# Altium PCB Sistema.PcbDoc (part 2 of 2)
Units mm, origin at the board's own origin, x right, y up, seen from the top; angles counter-clockwise.
Board outline 81.66 x 60.96 mm, 2 copper layers (Top Layer, Bottom Layer); 81 components, 62 nets, 413 pads, 84 vias.
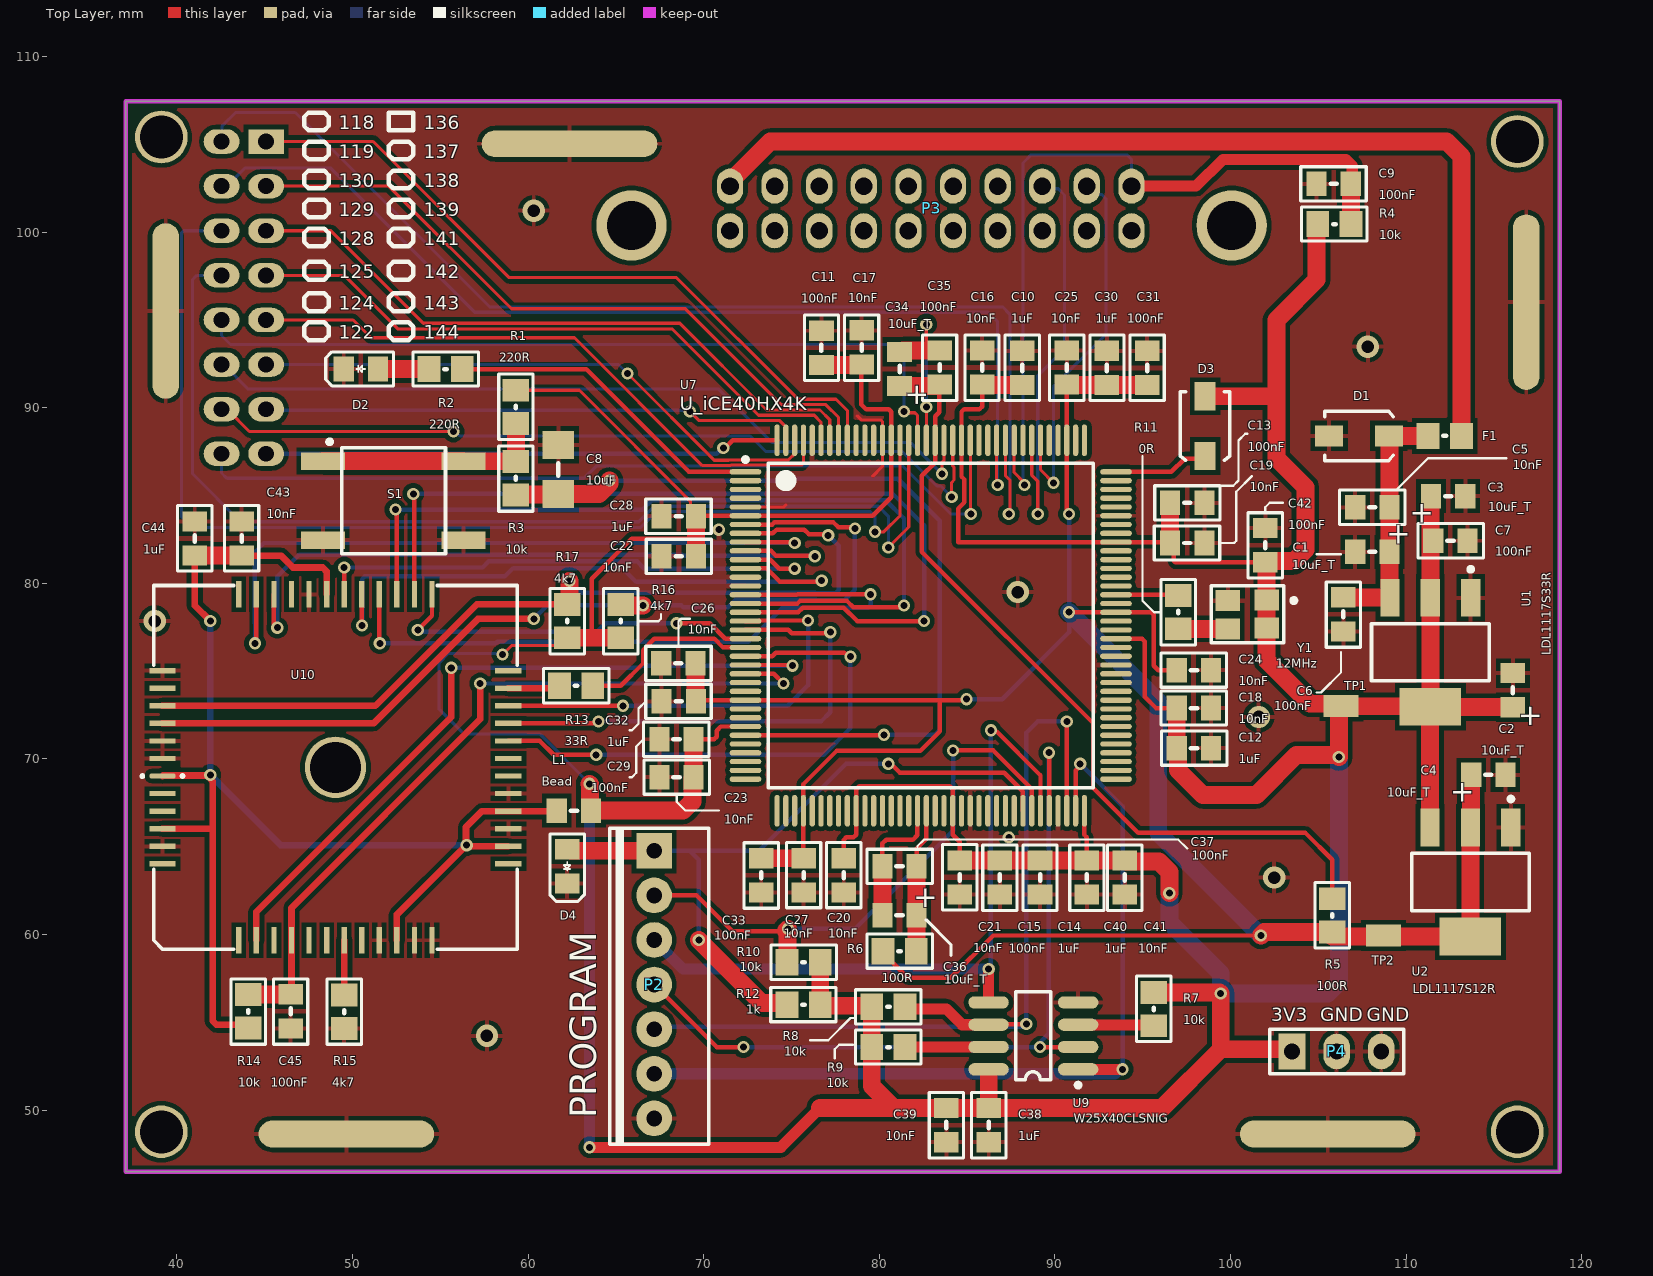
[diagram p0: Top Layer view]

## Via types
v1: diameter 0.7, hole 0.4, Top Layer to Bottom Layer, tented both sides, 77 vias
v2: diameter 1.27, hole 0.711, Top Layer to Bottom Layer, tented both sides, 7 vias

## Nets (pads, with @x,y where several pads share a name; then routed paths per layer and width w, separated by ;. In a path a pad name is that pad's centre, name@x,y a point inside that pad or via, vN(x,y) a via of type N, cw(c..) or ccw(c..) an arc to the next point about the centre after c; other vN are vias at no path point) (continued)
NetF1_1: F1.1 P3.A1 | length 59.1
  Top Layer w1.016: P3.A1 71.501,102.866 73.791,105.156 112.308,105.156 113.152,104.312 F1.1
NetP1_1: P1.1 U7.136 | length 41.1
  Top Layer w0.178: P1.1 51.181,105.156 58.928,97.409 68.453,97.409 75.38,90.482 77.539,90.482 78.181,89.84 U7.136
NetP1_2: P1.2 U7.118 | length 66.6
  Top Layer w0.178: U7.118 87.181,86.138 87.434,85.885 87.434,84.005 v1(87.376,83.947)
  Bottom Layer w0.178: P1.2 42.562,105.173 42.562,106.017 43.352,106.807 46.736,106.807 57.803,95.74 87.013,95.74 87.434,95.319 87.434,84.005 v1(87.376,83.947)
NetP1_3: P1.3 U7.137 | length 39.4
  Top Layer w0.178: P1.3 52.07,102.616 59.055,95.631 68.961,95.631 74.415,90.177 76.955,90.177 77.681,89.451 U7.137
NetP1_4: P1.4 U7.119 | length 60.1
  Top Layer w0.178: U7.119 86.681,85.658 v1(86.741,85.598)
  Bottom Layer w0.178: P1.4 42.862,102.616 43.904,103.657 48.743,103.657 56.965,95.435 86.198,95.435 86.741,94.892 v1(86.741,85.598)
NetP1_5: P1.5 U7.138 | length 37.7
  Top Layer w0.178: P1.5 48.768,100.076 54.038,94.805 68.644,94.805 73.576,89.873 76.624,89.873 77.181,89.316 U7.138
NetP1_6: P1.6 U7.130 | length 65.7
  Top Layer w0.178: v1(79.756,82.931) 80.264,82.931 81.181,83.848 U7.130
  Bottom Layer w0.178: P1.6 40.386,100.076 40.259,99.949 40.259,83.82 40.894,83.185 66.412,83.185 67.308,84.081 79.502,84.081 79.756,83.827 v1(79.756,82.931)
NetP1_7: P1.7 U7.139 | length 36.1
  Top Layer w0.178: P1.7 49.53,97.536 52.578,94.488 68.199,94.488 73.119,89.568 76.294,89.568 76.681,89.181 U7.139
NetP1_8: P1.8 U7.129 | length 62.5
  Top Layer w0.178: v1(80.518,82.042) 81.681,83.205 U7.129
  Bottom Layer w0.178: P1.8 41.143,97.536 40.891,97.285 40.894,97.282 40.894,86.233 43.619,83.508 66.304,83.508 67.182,84.386 79.952,84.386 80.518,83.82 v1(80.518,82.042)
NetP1_9: P1.9 U7.141 | length 35.4
  Top Layer w0.178: P1.9 50.038,94.996 51.054,93.98 62.647,93.98 69.926,86.701 71.533,86.701 71.558,86.726 75.562,86.726 75.681,86.845 U7.141
NetP1_10: P1.10 U7.128 | length 45.5
  Top Layer w0.178: v1(81.412,89.789) 81.489,89.712 82.028,89.712 82.175,89.565 82.175,88.153 U7.128
  Bottom Layer w0.178: P1.10 42.545,94.114 43.06,93.599 80.518,93.599 81.412,92.705 v1(81.412,89.789)
NetP1_11: P1.11 U7.142 | length 33.3
  Top Layer w0.178: v1(65.659,91.948) 70.601,87.006 71.407,87.006 71.432,87.031 74.833,87.031 75.181,87.38 U7.142
  Bottom Layer w0.178: P1.11 65.151,92.456 v1(65.659,91.948)
NetP1_12: P1.12 U7.125 | length 45.6
  Top Layer w0.178: v1(83.566,86.233) 83.566,86.862 83.681,86.977 U7.125
  Bottom Layer w0.178: P1.12 42.672,92.456 44.069,91.059 70.866,91.059 73.914,88.011 81.788,88.011 v1(83.566,86.233)
NetP1_13: P1.13 U7.143 | length 30.8
  Top Layer w0.178: v1(69.215,89.789) 69.741,89.263 74.333,89.263 74.681,88.914 U7.143
  Bottom Layer w0.178: P1.13 45.148,89.852 69.151,89.852 v1(69.215,89.789)
NetP1_14: P1.14 U7.124 | length 47
  Top Layer w0.178: P1.14 42.862,89.916 44.133,88.646 v1(55.753,88.646) ; v1(84.12,84.917) 84.12,85.741 84.259,85.881 84.259,86.616 84.181,86.694 U7.124
  Bottom Layer w0.178: v1(55.753,88.646) 55.864,88.646 56.118,88.392 72.644,88.392 73.533,87.503 81.316,87.503 83.279,85.54 83.497,85.54 v1(84.12,84.917)
NetP1_15: P1.15 U7.144 | length 29.4
  Top Layer w0.254: v1(71.12,87.699) 71.216,87.699 71.655,88.138 74.16,88.138 74.169,88.147 U7.144
  Bottom Layer w0.254: P1.15 70.748,87.376 71.071,87.699 v1(71.12,87.699)
NetP1_16: P1.16 U7.122 | length 49.5
  Top Layer w0.178: U7.122 85.199,88.129 85.199,83.965 v1(85.217,83.947)
  Bottom Layer w0.178: P1.16 42.545,86.283 42.849,85.979 63.181,85.979 63.874,86.672 81.349,86.672 84.074,83.947 v1(85.217,83.947)
NetP2_2: P2.2 R10.1 U7.66 | length 33.4
  Top Layer w0.254: P2.2 69.596,62.23 71.628,60.198 v1@74.676,60.198 ; v1(84.201,70.485) 86.487,70.485 88.681,68.291 U7.66
  Top Layer w1.016: v1@74.676,60.198 v1(74.803,60.325) 74.773,60.295 74.773,58.451 R10.1
  Bottom Layer w0.254: v1(74.803,60.325) 78.613,60.325 84.201,65.913 v1(84.201,70.485)
NetP2_3: P2.3 U7.67 U9.5 | length 41.2
  Top Layer w0.254: v1(86.36,71.628) 86.445,71.543 86.699,71.543 89.181,69.061 U7.67
  Top Layer w0.635: U9.5 86.223,58.029 v1(86.233,58.039)
  Bottom Layer w0.254: v1(86.233,58.039) 86.36,58.166 v1(86.36,71.628)
  Bottom Layer w0.635: P2.3 68.834,58.039 v1(86.233,58.039)
NetP2_4: P2.4 U7.68 U9.2 | length 45.9
  Top Layer w0.254: P2.4 70.739,53.594 v1(72.263,53.594) ; v1(89.154,53.594) U9.2 ; v1(89.662,70.358) 89.672,70.348 89.672,67.056 U7.68
  Bottom Layer w0.254: v1(72.263,53.594) v1(89.154,53.594) 89.154,53.869 89.662,54.377 v1(89.662,70.358)
NetP2_5: P2.5 R9.1 U7.70 U9.6 | length 52.9
  Top Layer w0.254: U9.6 86.241,54.882 88.351,54.882 v1(88.37,54.901) ; v1(90.678,72.136) 90.678,68.855 90.679,68.853 90.679,67.049 U7.70
  Top Layer w0.635: R9.1 81.595,55.753 83.82,55.753 84.709,54.864 U9.6
  Bottom Layer w0.254: P2.5 67.328,54.755 88.224,54.755 v1(88.37,54.901) 88.37,71.479 89.027,72.136 v1(90.678,72.136)
NetP2_6: P2.6 U7.71 U9.1 | length 50.5
  Top Layer w0.254: U7.71 91.181,69.343 91.44,69.602 v1(91.44,69.723)
  Top Layer w0.635: U9.1 v1(93.853,52.324)
  Bottom Layer w0.254: v1(91.44,69.723) 93.853,67.31 v1(93.853,52.324)
  Bottom Layer w0.635: P2.6 93.427,52.07 93.681,52.324 v1(93.853,52.324)
NetP3_A8: P3.A8 U7.115 | length 24.6
  Top Layer w0.178: U7.115 88.681,86.162 89.027,85.816 v1(89.027,83.947)
  Bottom Layer w0.178: v1(89.027,83.947) 89.027,91.828 90.551,93.352 90.551,102.108 90.194,102.465 89.432,102.465 P3.A8
NetP3_A9: P3.A9 U7.114 | length 21.5
  Top Layer w0.178: U7.114 89.181,86.46 v1(89.916,85.725)
  Bottom Layer w0.178: v1(89.916,85.725) 89.916,91.186 92.914,94.184 92.914,101.904 92.678,102.14 92.297,102.14 P3.A9
NetR1_1: R1.1 R3.1 S1.1 | length 13.2
  Top Layer w1.016: S1.1@48.324,86.959 56.324,86.959 56.332,86.951 59.287,86.951 R3.1 R1.1
NetR7_1: R7.1 U9.3 | length 4.3
  Top Layer w0.635: U9.3 91.335,54.852 95.582,54.852 R7.1
NetR8_1: R8.1 U9.7 | length 4.8
  Top Layer w0.635: R8.1 U9.7
NetR11_1: R11.1 U7.94 | length 3.6
  Top Layer w0.254: U7.94 96.99,79.347 R11.1
NetR11_2: R11.2 Y1.3 | length 2.8
  Top Layer w1.016: R11.2 97.029,77.408 Y1.3 Y1.3
NetR13_1: R13.1 U10.29 | length 3
  Top Layer w0.254: R13.1@61.645,74.025 R13.1
  Top Layer w0.381: U10.29 R13.1@61.645,74.025
NetR13_2: R13.2 U7.21 | length 10.4
  Top Layer w0.254: R13.2 65.278,74.168 66.548,75.438 66.548,76.2 67.183,76.835 70.612,76.835 71.1,76.347 U7.21
NetR15_2: R15.2 U10.13 | length 3.2
  Top Layer w0.381: R15.2@49.53,56.449 U10.13
NetR16_1: R16.1 U7.7 U10.46 | length 53.9
  Top Layer w0.254: U7.7 73.9,83.347 74.019,83.466 77.392,83.466 77.656,83.201 78.528,83.201 v1(78.613,83.116)
  Top Layer w0.381: U10.46 51.197,72.025 57.15,77.978 v1(60.325,77.978)
  Top Layer w1.016: R16.1 65.339,78.74 v1(66.548,78.74)
  Bottom Layer w0.254: v1(60.325,77.978) 61.087,78.74 68.718,78.74 68.83,78.628 71.386,78.628 71.816,79.057 76.407,79.057 76.423,79.041 78.025,79.041 78.613,79.629 v1(78.613,83.116)
NetR17_1: R17.1 U7.8 U10.45 | length 50.8
  Top Layer w0.254: U7.8@72.39,82.838 72.399,82.847 73.939,82.847 74.15,83.058 75.729,83.058 75.983,82.804 77.02,82.804 v1(77.089,82.735)
  Top Layer w0.381: U10.45 51.305,73.025 57.081,78.801 R17.1
  Top Layer w1.016: R17.1 62.357,78.928 v1(62.357,80.137)
  Bottom Layer w0.254: v1(62.357,80.137) 63.023,79.471 76.367,79.471 76.399,79.438 76.564,79.438 76.581,79.422 77.494,79.422 77.692,79.62 77.692,82.132 v1(77.089,82.735)
NetU7_9: U7.9 U10.41 | length 41.8
  Top Layer w0.254: v1(44.45,76.581) 44.53,76.661 U10.41 ; U7.9 72.39,82.338 75.142,82.338 v1(75.184,82.296)
  Bottom Layer w0.254: v1(44.45,76.581) 44.472,76.603 44.472,77.702 44.45,77.724 44.45,81.788 44.958,82.296 v1(75.184,82.296)
NetU7_10: U7.10 U10.40 | length 40.1
  Top Layer w0.254: U10.40 45.53,77.66 v1(45.72,77.47) ; U7.10 73.837,81.847 74.119,81.565 76.296,81.565 v1(76.327,81.534)
  Bottom Layer w0.254: v1(45.72,77.47) 45.72,80.391 46.959,81.63 68.782,81.63 68.847,81.565 76.296,81.565 v1(76.327,81.534)
NetU7_11: U7.11 U10.36 | length 30.5
  Top Layer w0.254: U10.36 v1(49.53,80.899) ; U7.11 73.798,81.347 74.311,80.834 v1(75.184,80.834)
  Bottom Layer w0.254: v1(49.53,80.899) 57.415,80.899 57.765,81.249 66.207,81.249 66.622,80.834 v1(75.184,80.834)
NetU7_12: U7.12 U10.35 | length 35.9
  Top Layer w0.254: U10.35 50.538,79.367 50.538,77.605 v1(50.546,77.597) ; U7.12 73.585,80.847 74.342,80.09 76.655,80.09 v1(76.718,80.153)
  Bottom Layer w0.254: v1(50.546,77.597) 50.546,80.242 50.695,80.391 58.674,80.391 59.151,80.868 65.371,80.868 66.149,80.09 76.655,80.09 v1(76.718,80.153)
NetU7_15: U7.15 U10.34 | length 39.4
  Top Layer w0.254: U10.34 51.53,76.613 v1(51.562,76.581) ; U7.15 75.3,79.347 75.328,79.375 v1(79.502,79.375)
  Bottom Layer w0.254: v1(51.562,76.581) 58.148,76.581 58.244,76.677 72.55,76.677 74.486,78.613 79.353,78.613 79.502,78.762 v1(79.502,79.375)
NetU7_16: U7.16 U10.33 | length 48.7
  Top Layer w0.254: v1(52.451,84.201) 52.53,84.122 U10.33 ; U7.16 75.338,78.847 75.485,78.994 78.163,78.994 78.513,78.644 81.19,78.644 81.286,78.74 v1(81.407,78.74)
  Bottom Layer w0.254: v1(52.451,84.201) 66.512,84.201 67.04,84.729 80.371,84.729 81.407,83.693 v1(81.407,78.74)
NetU7_17: U7.17 U10.32 | length 51.6
  Top Layer w0.254: v1(53.467,85.09) 53.53,85.027 U10.32 ; U7.17 75.377,78.347 75.643,78.613 77.978,78.613 78.74,77.851 v1(82.55,77.851)
  Bottom Layer w0.254: v1(53.467,85.09) 66.863,85.09 66.882,85.11 80.752,85.11 82.55,83.312 v1(82.55,77.851)
NetU7_18: U7.18 U10.28 | length 24.8
  Top Layer w0.254: U10.28 v1(65.405,73.025) ; U7.18 73.143,77.847 73.178,77.882 v1(75.946,77.882)
  Bottom Layer w0.254: v1(65.405,73.025) 74.781,73.025 75.946,74.19 v1(75.946,77.882)
NetU7_19: U7.19 U10.27 | length 28.1
  Top Layer w0.254: U10.27 63.776,72.025 63.887,72.136 v1(64.008,72.136) ; U7.19 74.824,77.347 75.02,77.151 77.151,77.151 v1(77.216,77.216)
  Bottom Layer w0.254: v1(64.008,72.136) 76.686,72.136 77.216,72.666 v1(77.216,77.216)
NetU7_20: U7.20 U10.31 | length 21.6
  Top Layer w0.254: v1(53.721,77.343) 54.53,78.152 U10.31 ; v1(68.453,77.724) 70.358,77.724 71.235,76.847 U7.20
  Bottom Layer w0.254: v1(53.721,77.343) 53.817,77.247 63.939,77.247 64.416,77.724 v1(68.453,77.724)
NetU7_22: U7.22 U10.26 | length 30.7
  Top Layer w0.254: U10.26 60.674,71.025 61.468,70.231 v1(63.881,70.231) ; U7.22 73.905,75.847 74.1,76.042 78.015,76.042 78.238,75.819 v1(78.359,75.819)
  Bottom Layer w0.254: v1(63.881,70.231) 76.835,70.231 78.359,71.755 v1(78.359,75.819)
NetU7_23: U7.23 U10.8 | length 42.3
  Top Layer w0.254: U7.23 75.021,75.347 v1(75.057,75.311)
  Top Layer w0.381: U10.8 44.53,61.294 55.626,72.39 v1(55.626,75.184)
  Bottom Layer w0.254: v1(55.626,75.184) 66.327,75.184 66.454,75.311 v1(75.057,75.311)
VAA: C43.2 C44.2 L1.2 R14.2 U10.1 U10.4 U10.16 U10.20 U10.22 U10.37 | length 76.1
  Top Layer w0.381: U10.4 42.037,66.025 ; U10.1 39.211,69.056 41.878,69.056 v1(41.91,69.088) 41.971,69.027 41.971,68.801 42.037,68.735 42.037,66.025 ; C44.2 41.021,78.74 v1(41.91,77.851) ; C43.2 45.933,81.575 46.609,80.899 48.307,80.899 48.53,80.676 U10.37 ; R14.2 43.881,54.864 42.26,54.864 42.037,55.087 42.037,66.025 ; U10.16 52.53,61.136 v1@56.467,65.074 ; v1@56.467,65.089 56.467,66.119 57.373,67.025 U10.22 61.605,67.025 L1.2 ; v1@56.516,65.025 U10.20
  Top Layer w1.016: C44.2 C43.2
  Bottom Layer w0.381: v1(41.91,77.851) v1(41.91,69.088) 45.909,65.089 v1(56.503,65.089)
pads on no net: P3.A2 P3.A3 P3.A4 P3.A5 P3.A6 P3.A7 P3.B1 P3.B2 P3.B3 P3.B4 P3.B5 P3.B6 P3.B7 P3.B8 P3.B9 P3.B10 P3.SOP U7.2 U7.3 U7.4 U7.25 U7.26 U7.28 U7.29 U7.32 U7.33 U7.34 U7.35 U7.36 U7.37 U7.38 U7.39 U7.41 U7.42 U7.43 U7.44 U7.45 U7.47 U7.48 U7.49 U7.50 U7.51 U7.52 U7.55 U7.56 U7.58 U7.60 U7.61 U7.62 U7.63 U7.64 U7.73 U7.74 U7.75 U7.76 U7.77 U7.78 U7.79 U7.80 U7.81 U7.82 U7.83 U7.84 U7.85 U7.87 U7.88 U7.90 U7.91 U7.93 U7.95 U7.96 U7.97 U7.98 U7.99 U7.101 U7.102 U7.104 U7.105 U7.106 U7.107 U7.109 U7.110 U7.112 U7.113 U7.116 U7.120 U7.121 U7.133 U7.134 U7.135 U10.2 U10.3 U10.6 U10.7 U10.9 U10.11 U10.12 U10.14 U10.19 U10.24 U10.25 U10.30 U10.39 U10.42 U10.44

## Polygon pours and split planes (outlines as drawn)
GND on Top Layer "GND_L01_P001" (solid, pour order 1): 37.084,46.482 37.084,107.442 118.745,107.442 118.745,46.482
GND on Bottom Layer "GND_L02_P000" (solid, pour order 0): 37.084,46.482 37.084,107.442 118.745,107.442 118.745,46.482

## Keep-outs
Keep-Out Layer:
  the board outline again, w0.254

## Silkscreen, mask and mechanical layers (free items; w line width, h text height)
Top Overlay:
  drawing of 173 lines, arcs and shapes, not listed
  text "118" at 49.225,105.867 h0.76
  text "136" at 54.051,105.867 h0.76
  text "119" at 49.225,104.216 h0.76
  text "137" at 54.051,104.216 h0.76
  text "130" at 49.225,102.565 h0.76
  text "138" at 54.051,102.565 h0.76
  text "129" at 49.225,100.914 h0.76
  text "139" at 54.051,100.914 h0.76
  text "128" at 49.225,99.263 h0.76
  text "141" at 54.051,99.263 h0.76
  text "125" at 49.225,97.358 h0.76
  text "142" at 54.051,97.358 h0.76
  text "124" at 49.225,95.58 h0.76
  text "143" at 54.051,95.58 h0.76
  text "122" at 49.225,93.929 h0.76
  text "144" at 54.051,93.929 h0.76
  text "3V3" at 102.311,55.067 h0.76
  text "GND" at 105.105,55.067 h0.76
  text "GND" at 107.772,55.067 h0.76
Bottom Overlay:
  drawing of 4 lines, arcs and shapes, not listed
  text "FACULTAD" at 65.92,79.979 h2.54
  text "DE" at 65.793,75.915 h2.54
  text "INGENIERIA" at 66.174,72.105 h2.54
  text "UNMDP" at 107.315,69.342 h2.54

## Dimensions
37.084,46.482 to 118.745,107.442 on Top Overlay
118.745,46.482 to 118.745,107.442 on Top Overlay

## Text inside footprints (layer, text, board x,y; h text height)
C1: Top Overlay "+" at 110.252,83.313 h1.2 r180
C2: Top Overlay "+" at 117.603,71.739 h1.2 r90
C3: Top Overlay "+" at 110.22,83.438 h1.2
C4: Top Overlay "+" at 112.506,67.563 h1.2
C34: Top Overlay "+" at 82.678,90.027 h1.2 r90
C36: Top Overlay "+" at 83.328,62.612 h1.2 r180